# Altium PCB PCB1.PcbDoc
Units mil, origin at the board's own origin, x right, y up, seen from the top; angles counter-clockwise.
Board outline 6000 x 4000 mil, 2 copper layers (Top Layer, Bottom Layer); 1 components, 40 nets, 32 pads, 0 vias.
Unrouted connection lines stored in the file: 10.
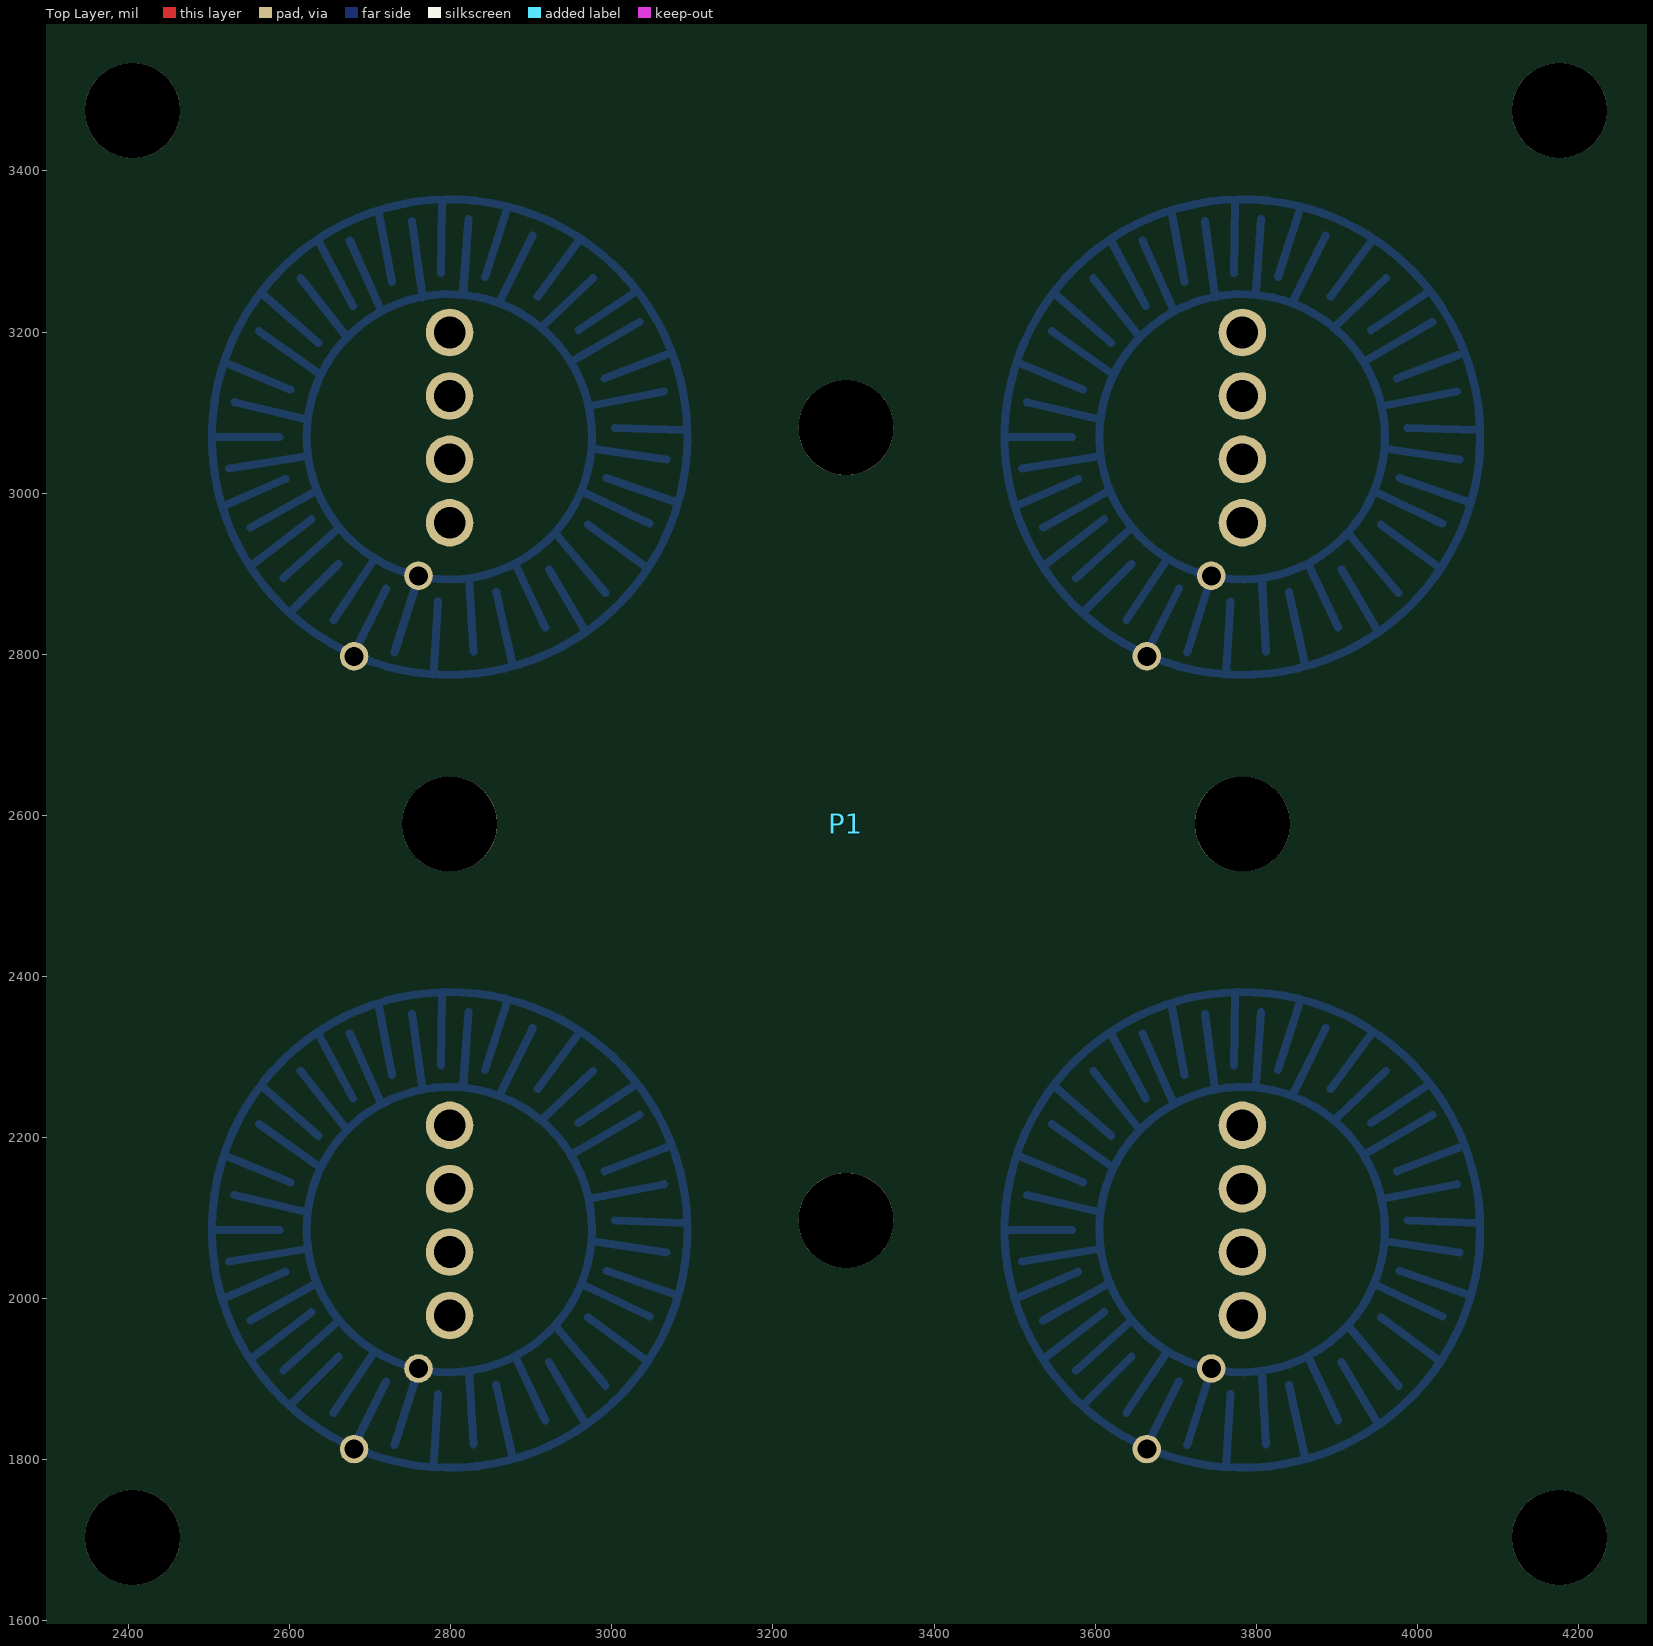
[diagram p0: Top Layer view]
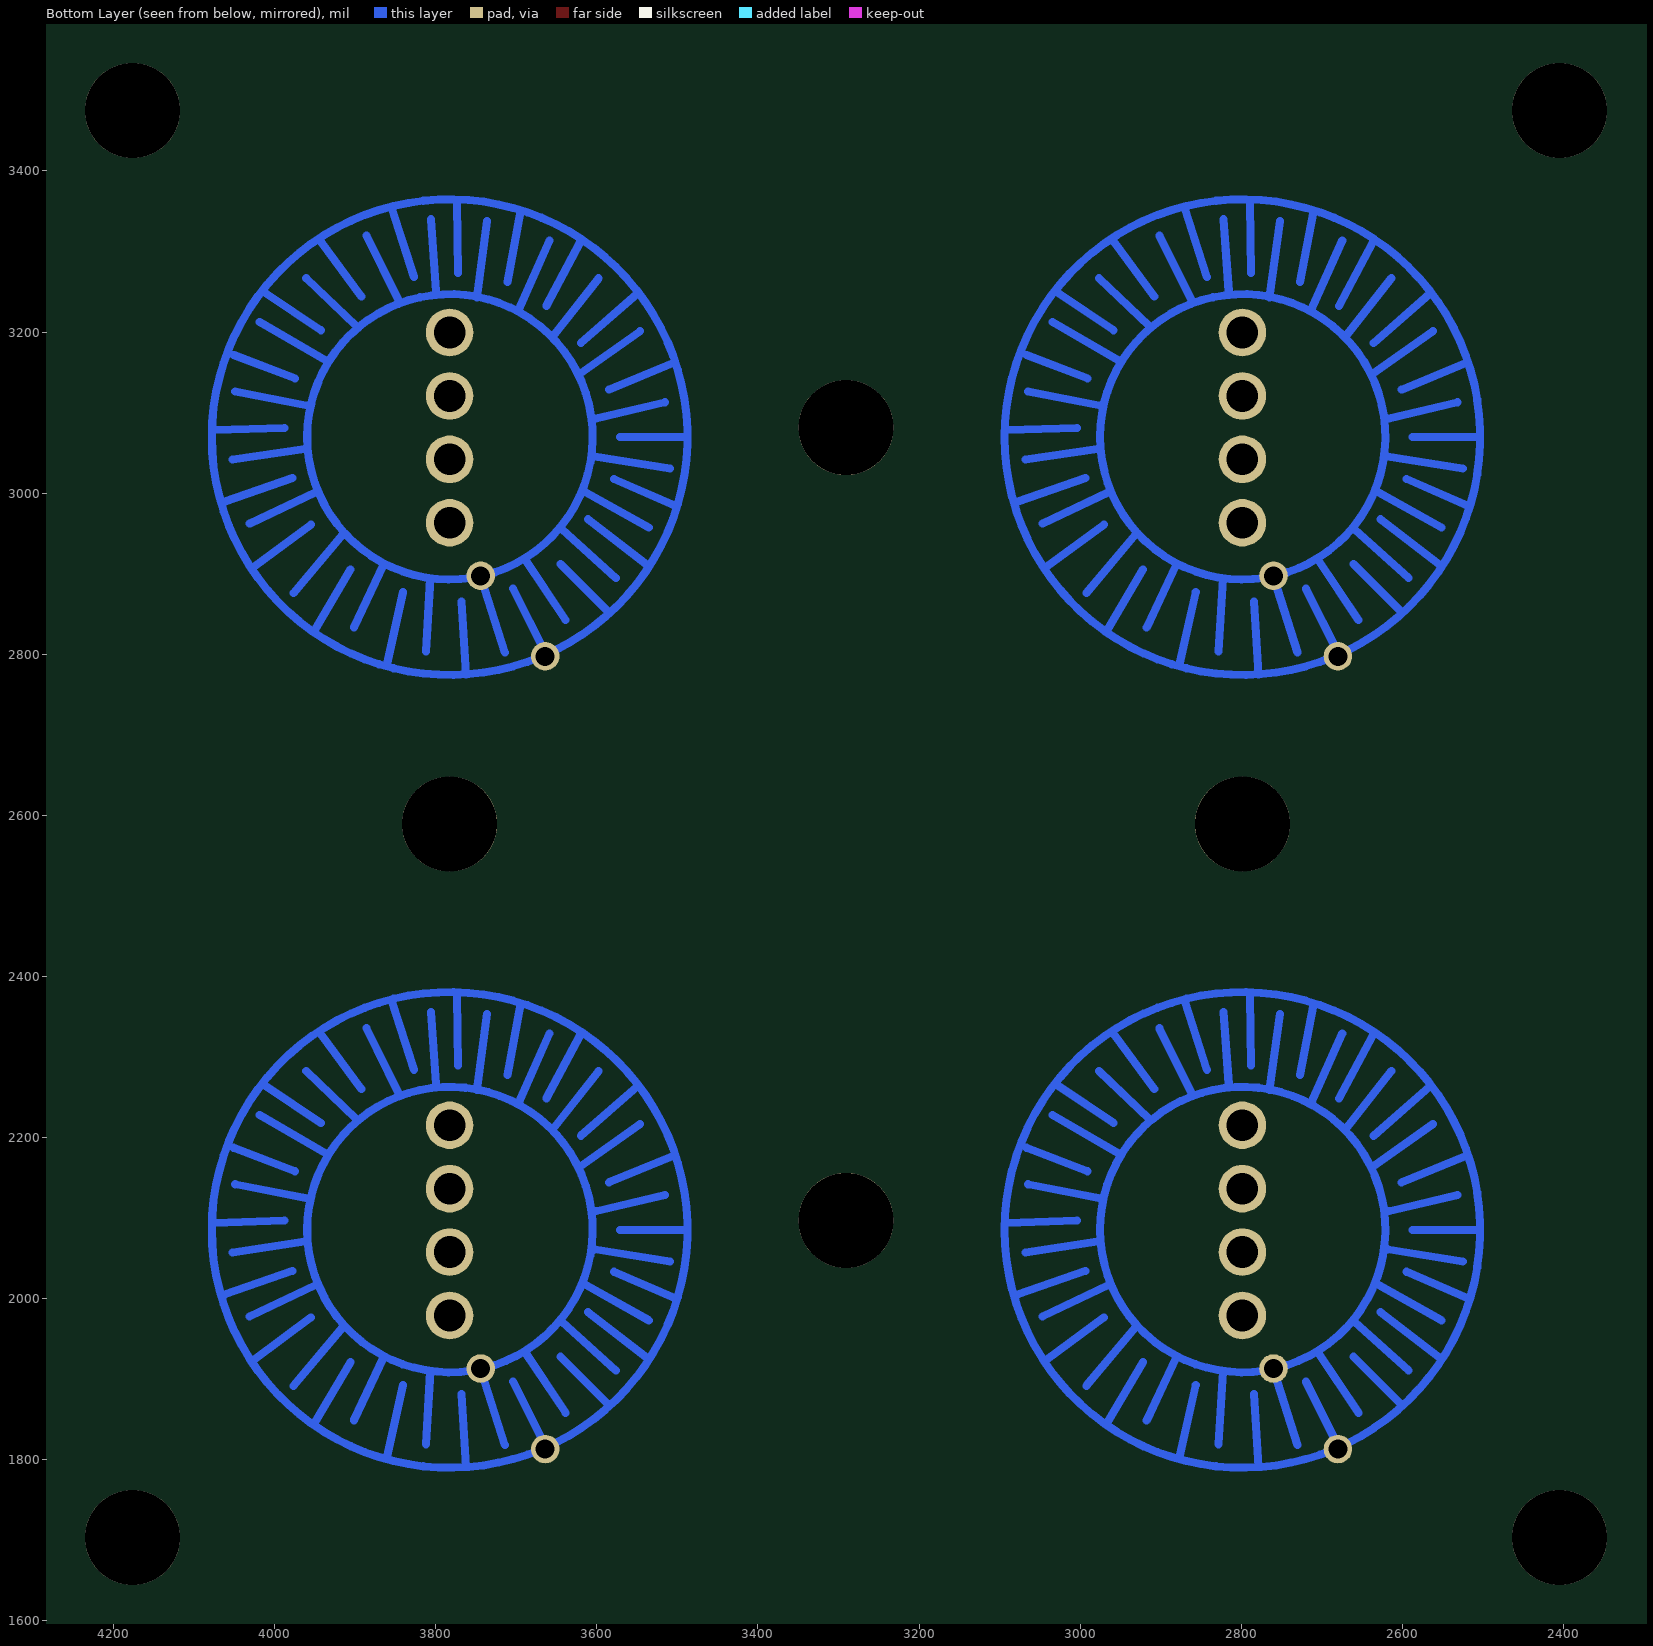
[diagram p1: Bottom Layer view, seen from below]

## Layer stack, top to bottom
Top Solder: solder mask 0.4, Solder Resist, Dk 3.5
Top Layer: signal copper 1.4
Dielectric 1: dielectric 12.6, FR-4, Dk 4.8
Bottom Layer: signal copper 1.4
Bottom Solder: solder mask 0.4, Solder Resist, Dk 3.5

## Board outline
1000,1000 7000,1000 7000,5000 1000,5000

## Design rules (kind name [scope] priority, off if disabled: settings)
Clearance [All] p1: gap=10
PolygonConnect [All] p1: connectstyle=Relief reliefconductorwidth=10 reliefentries=4 polygonreliefangle="90 Angle" airgapwidth=10
RoutingVias [All] p1: holewidth=28 width=50 viastyle="Through Hole" minholewidth=28 minwidth=50 maxholewidth=28 maxwidth=50
SolderMaskExpansion [All] p1: expansion=4
Width [All] p1: maxlimit=10 minlimit=10 preferedwidth=10
30 further rules are at their usual default settings.

## Components (designator, comment, footprint, x,y, rotation, side; value= is the part's Value field where it differs from the comment)
P1 "BUTTONPAD-4x4" BUTTONPAD-2X2 4275,1605 r90 top

## Footprints (in the part's own frame and the unit in brackets; to place one, negate y for a bottom-side part, rotate by r counter-clockwise, add the part's x,y. Pads: shape width x height; smd on the part's side, far side on the other; paste and mask are expansions set on the pad)
BUTTONPAD-2X2 [mm]
  round 3 hole 3: 1(2.5,47.5) 1(2.5,2.5) 1(12.5,25) 1(25,37.5) 1(25,12.5) 1(37.5,25) 1(47.5,47.5) 1(47.5,2.5)
  round 1.5 hole 1: BLU1(13.5,12.5) BLU2(38.5,12.5) BLU3(13.5,37.5) BLU4(38.5,37.5) GND1(11.5,12.5) GND2(36.5,12.5) GND3(11.5,37.5) GND4(36.5,37.5) GRN1(15.5,12.5) GRN2(40.5,12.5) GRN3(15.5,37.5) GRN4(40.5,37.5) RED1(9.5,12.5) RED2(34.5,12.5) RED3(9.5,37.5) RED4(34.5,37.5)
  round 0.9 hole 0.6: SIG1(5.288,15.513) SIG2(7.828,13.481) SIG3(30.288,15.513) SIG4(32.828,13.481) SIG5(5.288,40.513) SIG6(7.828,38.481) SIG7(30.288,40.513) SIG8(32.828,38.481)
  Bottom Layer circle w0.254: c37.2,12.5 r7.5
  Bottom Layer circle w0.254: c12.2,12.5 r7.5
  Bottom Layer circle w0.254: c37.2,37.5 r7.5
  Bottom Layer circle w0.254: c12.2,37.5 r7.5
  Bottom Layer lines w0.254: 12.2,44.96 12.2,42.87 ; 37.2,44.96 37.2,42.87 ; 10.04,44.61 10.88,42.68 ; 35.04,44.61 35.88,42.68 ; 14.53,44.53 13.7,42.52 ; 39.53,44.53 38.7,42.52 ; 11.21,44.45 11.59,42.07 ; 36.21,44.45 36.59,42.07 ; 13.3,44.29 12.79,42.12 ; 38.3,44.29 37.79,42.12 ; 9.35,43.78 10.46,41.8 ; 34.35,43.78 35.46,41.8 ; 8.19,43.7 9.61,41.86 ; 33.19,43.7 34.61,41.86 ; 15.54,43.51 14.18,41.59 ; 40.54,43.51 39.18,41.59 ; 16.72,43.41 15.17,41.64 ; 41.72,43.41 40.17,41.64 ; 7.76,42.74 9.29,41.05 ; 32.76,42.74 34.29,41.05 ; 6.7,42.5 8.2,41 ; 31.7,42.5 33.2,41 ; 17.21,42.2 15.38,40.76 ; 42.21,42.2 40.38,40.76 ; 18.35,41.62 16.34,40.55 ; 43.35,41.62 41.34,40.55 ; 6.43,41.16 8.35,39.88 ; 31.43,41.16 33.35,39.88 ; 18.4,40.65 16.18,39.66 ; 43.4,40.65 41.18,39.66 ; 5.36,40.54 7.42,39.5 ; 30.36,40.54 32.42,39.5 ; 19.31,39.74 17.09,39.32 ; 44.31,39.74 42.09,39.32 ; 5.41,39.24 7.74,38.5 ; 30.41,39.24 32.74,38.5 ; 19.01,38.68 16.629,38.363 ; 44.01,38.68 41.629,38.363 ; 16.61,38.36 16.629,38.363 ; 41.61,38.36 41.629,38.363 ; 4.72,38.01 7.02,37.87 ; 29.72,38.01 32.02,37.87 ; 17.38,37.77 19.58,37.74 ; 42.38,37.77 44.58,37.74 ; 16.8,37.07 19.07,36.91 ; 41.8,37.07 44.07,36.91 ; 7.74,36.89 5.44,36.75 ; 32.74,36.89 30.44,36.75 ; 17.25,36.38 19.42,35.68 ; 42.25,36.38 44.42,35.68 ; 7.31,36.03 5.04,35.52 ; 32.31,36.03 30.04,35.52 ; 16.5,35.9 18.56,34.88 ; 41.5,35.9 43.56,34.88 ; 8.19,35.42 6.19,34.48 ; 33.19,35.42 31.19,34.48 ; 16.64,34.72 18.37,33.44 ; 41.64,34.72 43.37,33.44 ; 15.7,34.56 17.21,32.98 ; 40.7,34.56 42.21,32.98 ; 8.03,34.37 6.13,33.25 ; 33.03,34.37 31.13,33.25 ; 9.13,34.13 7.28,32.58 ; 34.13,34.13 32.28,32.58 ; 14.61,33.6 15.83,31.51 ; 39.61,33.6 40.83,31.51 ; 15.57,33.44 16.74,31.7 ; 40.57,33.44 41.74,31.7 ; 10.46,33.28 9.47,31.19 ; 35.46,33.28 34.47,31.19 ; 9.44,33.13 8.11,31.33 ; 34.44,33.13 33.11,31.33 ; 13.19,33.04 13.64,30.74 ; 38.19,33.04 38.64,30.74 ; 11.83,32.93 11.49,30.66 ; 36.83,32.93 36.49,30.66 ; 14.05,32.62 14.79,30.69 ; 39.05,32.62 39.79,30.69 ; 10.91,32.55 10.17,30.42 ; 35.91,32.55 35.17,30.42 ; 12.49,32.29 12.42,30.06 ; 37.49,32.29 37.42,30.06 ; 12.2,19.96 12.2,17.87 ; 37.2,19.96 37.2,17.87 ; 10.04,19.61 10.88,17.68 ; 35.04,19.61 35.88,17.68 ; 14.53,19.53 13.7,17.52 ; 39.53,19.53 38.7,17.52 ; 11.21,19.45 11.59,17.07 ; 36.21,19.45 36.59,17.07 ; 13.3,19.29 12.79,17.12 ; 38.3,19.29 37.79,17.12 ; 9.35,18.78 10.46,16.8 ; 34.35,18.78 35.46,16.8 ; 8.19,18.7 9.61,16.86 ; 33.19,18.7 34.61,16.86 ; 15.54,18.51 14.18,16.59 ; 40.54,18.51 39.18,16.59 ; 16.72,18.41 15.17,16.64 ; 41.72,18.41 40.17,16.64 ; 7.76,17.74 9.29,16.05 ; 32.76,17.74 34.29,16.05 ; 6.7,17.5 8.2,16 ; 31.7,17.5 33.2,16 ; 17.21,17.2 15.38,15.76 ; 42.21,17.2 40.38,15.76 ; 18.35,16.62 16.34,15.55 ; 43.35,16.62 41.34,15.55 ; 6.43,16.16 8.35,14.88 ; 31.43,16.16 33.35,14.88 ; 18.4,15.65 16.18,14.66 ; 43.4,15.65 41.18,14.66 ; 5.36,15.54 7.42,14.5 ; 30.36,15.54 32.42,14.5 ; 19.31,14.74 17.09,14.32 ; 44.31,14.74 42.09,14.32 ; 5.41,14.24 7.74,13.5 ; 30.41,14.24 32.74,13.5 ; 19.01,13.68 16.629,13.362 ; 44.01,13.68 41.629,13.362 ; 16.61,13.36 16.629,13.362 ; 41.61,13.36 41.629,13.362 ; 4.72,13.01 7.02,12.87 ; 29.72,13.01 32.02,12.87 ; 17.38,12.77 19.58,12.74 ; 42.38,12.77 44.58,12.74 ; 16.8,12.07 19.07,11.91 ; 41.8,12.07 44.07,11.91 ; 7.74,11.89 5.44,11.75 ; 32.74,11.89 30.44,11.75 ; 17.25,11.38 19.42,10.68 ; 42.25,11.38 44.42,10.68 ; 7.31,11.03 5.04,10.52 ; 32.31,11.03 30.04,10.52 ; 16.5,10.9 18.56,9.88 ; 41.5,10.9 43.56,9.88 ; 8.19,10.42 6.19,9.48 ; 33.19,10.42 31.19,9.48 ; 16.64,9.72 18.37,8.44 ; 41.64,9.72 43.37,8.44 ; 15.7,9.56 17.21,7.98 ; 40.7,9.56 42.21,7.98 ; 8.03,9.37 6.13,8.25 ; 33.03,9.37 31.13,8.25 ; 9.13,9.13 7.28,7.58 ; 34.13,9.13 32.28,7.58 ; 14.61,8.6 15.83,6.51 ; 39.61,8.6 40.83,6.51 ; 15.57,8.44 16.74,6.7 ; 40.57,8.44 41.74,6.7 ; 10.46,8.28 9.47,6.19 ; 35.46,8.28 34.47,6.19 ; 9.44,8.13 8.11,6.33 ; 34.44,8.13 33.11,6.33 ; 13.19,8.04 13.64,5.74 ; 38.19,8.04 38.64,5.74 ; 11.83,7.93 11.49,5.66 ; 36.83,7.93 36.49,5.66 ; 14.05,7.62 14.79,5.69 ; 39.05,7.62 39.79,5.69 ; 10.91,7.55 10.17,5.42 ; 35.91,7.55 35.17,5.42 ; 12.49,7.29 12.42,5.06 ; 37.49,7.29 37.42,5.06 ; 16.629,38.363 ccw(c12.21,37.51) 12.21,33.01 ccw(c12.21,37.51) 16.629,38.363 ; 41.629,38.363 ccw(c37.21,37.51) 37.21,33.01 ccw(c37.21,37.51) 41.629,38.363 ; 16.629,13.362 ccw(c12.21,12.51) 12.21,8.01 ccw(c12.21,12.51) 16.629,13.362 ; 41.629,13.362 ccw(c37.21,12.51) 37.21,8.01 ccw(c37.21,12.51) 41.629,13.362

## Part data
P1: library part BUTTONPAD-2X2, "5mm Button PadProven layout and schematic for 2x2 button pad. Panelize this device/fp to a 4x4 pad if needed. Spark Fun Electronics SKU : COM-07835. Compatible common cathode tri-color LED SKU : COM-00105"

## Nets (pads, with @x,y where several pads share a name; then routed paths per layer and width w, separated by ;. In a path a pad name is that pad's centre, name@x,y a point inside that pad or via, vN(x,y) a via of type N, cw(c..) or ccw(c..) an arc to the next point about the centre after c; other vN are vias at no path point)
BLUE1: 
BLUE2: 
BLUE3: P1.BLU3 P1.BLU4
BLUE4: P1.BLU1 P1.BLU2
GREEN1: 
GREEN2: 
GREEN3: P1.GRN3 P1.GRN4
GREEN4: P1.GRN1 P1.GRN2
LED-GND1: P1.GND1 P1.GND3
LED-GND2: P1.GND2 P1.GND4
LED-GND3: 
LED-GND4: 
NetD1_P$1: 
NetD2_P$1: 
NetD3_P$1: P1.SIG6
NetD4_P$1: P1.SIG2
NetD5_P$1: 
NetD6_P$1: 
NetD7_P$1: P1.SIG8
NetD8_P$1: P1.SIG4
NetD9_P$1: 
NetD10_P$1: 
NetD11_P$1: 
NetD12_P$1: 
NetD13_P$1: 
NetD14_P$1: 
NetD15_P$1: 
NetD16_P$1: 
RED1: 
RED2: 
RED3: P1.RED3 P1.RED4
RED4: P1.RED1 P1.RED2
SWITCH1: 
SWITCH2: 
SWITCH3: P1.SIG5 P1.SIG7
SWITCH4: P1.SIG1 P1.SIG3
SWT-GND1: 
SWT-GND2: 
SWT-GND3: 
SWT-GND4: 
pads on no net: P1.1

## Text inside footprints (layer, text, board x,y; h text height)
P1: Mechanical 2 "C2" at 3713.98,3051.85 h62 r90; Mechanical 2 "C1" at 3704.13,2067.6 h62 r90; Mechanical 2 "C4" at 2719.88,3051.85 h62 r90; Mechanical 2 "C3" at 2719.88,2067.6 h62 r90